# EAGLE board bt121_breakout_board_v10 (EAGLE 6.5.0)
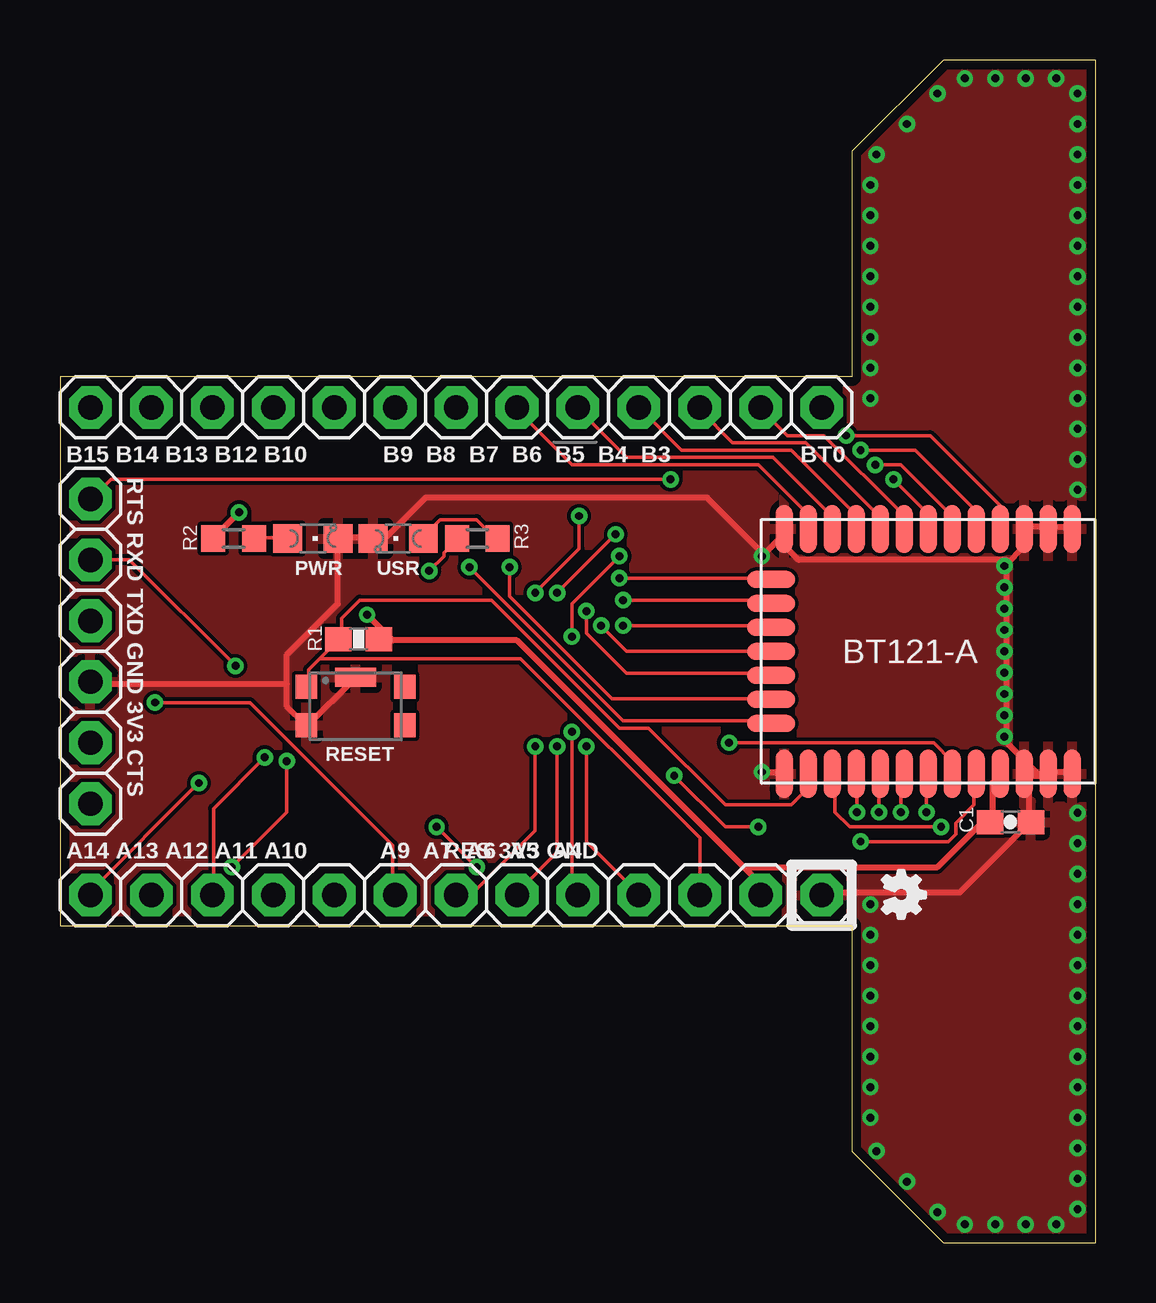
[diagram p0: board, top side]
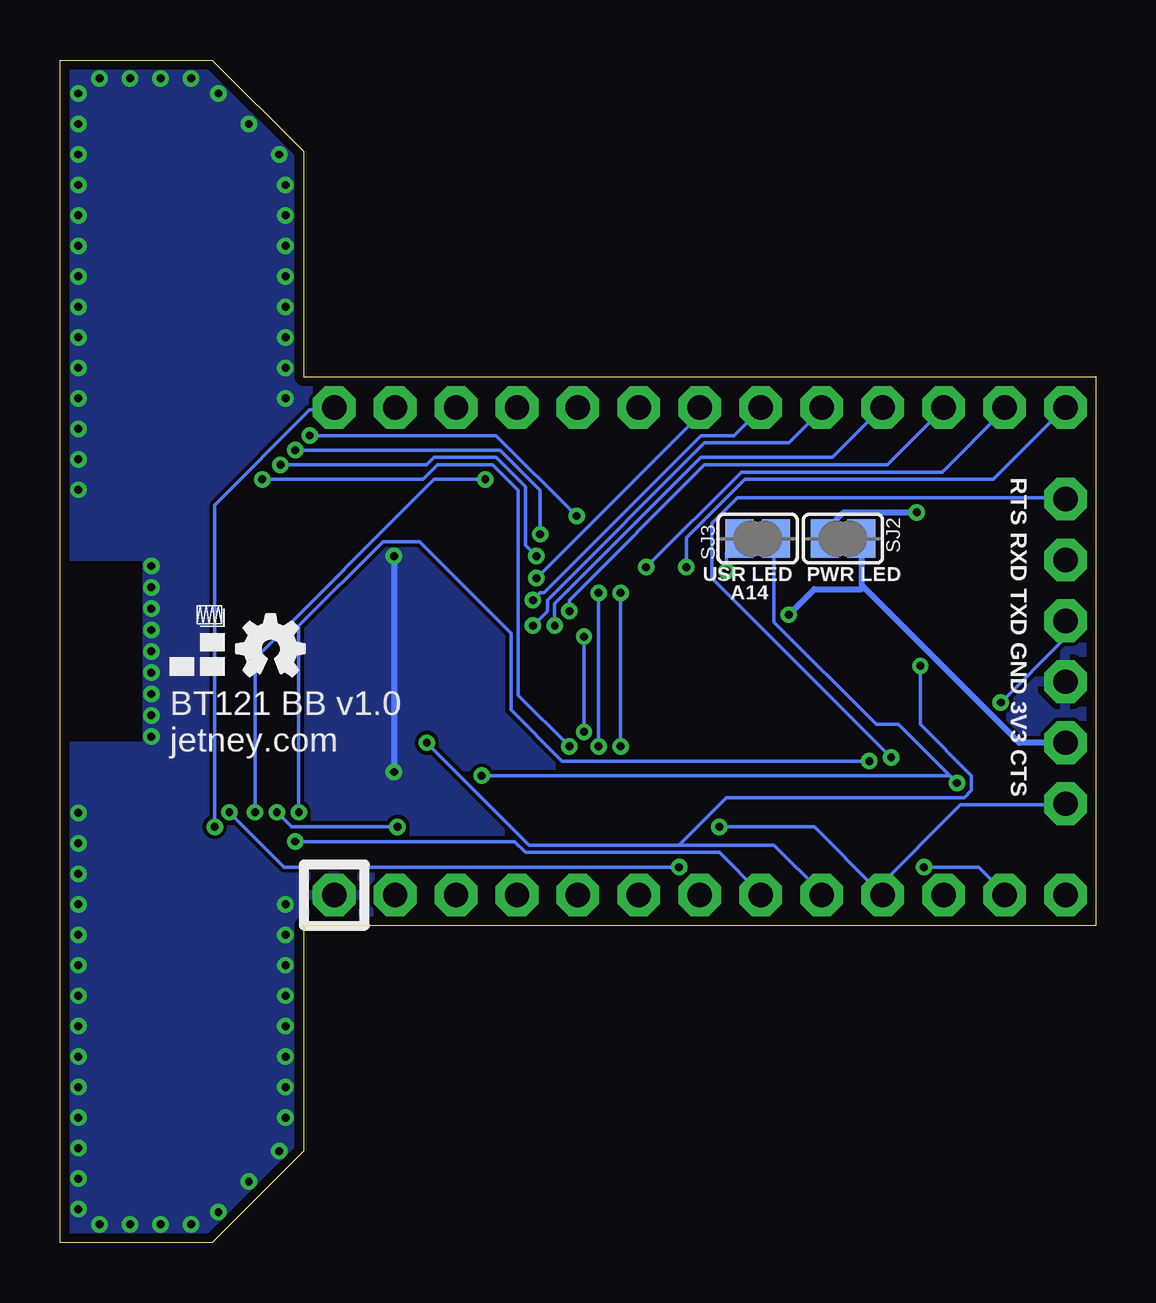
[diagram p1: board, bottom side, seen from below]

Size 43.18 x 49.28 mm. Coordinates in mm from the lower left corner, seen from the top.
Outline: 0,13.21 33.02,13.21 33.02,3.81 36.83,0 43.18,0 43.18,49.28 36.83,49.28 33.02,45.47 33.02,36.07 0,36.07 0,13.21
Copper layers (1*16): Top 0.0356mm / dielectric 1.5011mm / Bottom 0.0356mm
Design rules "default": minimum track width 6mil, minimum drill 13mil, track to track 6mil, track to pad 6mil, pad to pad 6mil, via to via 6mil, smd to smd 6mil, copper to edge 15mil, drill to drill 6mil, minimum pad ring 7mil, minimum via ring 7mil, stop-mask expansion 4mil, vias tented up to drill 13mil, thermal gap 10mil
Net classes: 0 default: width 0.152 mm, drill 0.33 mm, clearance 0.152 mm; 1 power: width 0.254 mm, drill 0.33 mm, clearance 0.152 mm
vRestrict: area 0,32.5 to 33,33.3; area 0,16 to 33,16.9; area 30.5,19.6 to 40.6,29.7; area 2.8,17 to 3.6,32.3

## Footprints (pad centres in the part's own frame; a part is rotated, then mirrored left to right if it is on the bottom)
0603-CAP = smd 1.1 x 1: 1 -0.85,0; 2 0.85,0
1X13 = drill 1.016 pad 1.778 octagon: 1 -15.24,0; 2 -12.7,0; 3 -10.16,0; 4 -7.62,0; 5 -5.08,0; 6 -2.54,0; 7 0,0; 8 2.54,0; 9 5.08,0; 10 7.62,0; 11 10.16,0; 12 12.7,0; 13 15.24,0
1X06 = drill 1.016 pad 1.778 octagon: 1 -6.35,0; 2 -3.81,0; 3 -1.27,0; 4 1.27,0; 5 3.81,0; 6 6.35,0
CHIPLED_0805 = smd 1.2 x 1.2: A 0,-1.05; C 0,1.05
0603-RES = smd 1.1 x 1: 1 -0.85,0; 2 0.85,0
R0603 = smd 1 x 1.1: 1 -0.85,0; 2 0.85,0
101-IG = smd 0.9 x 1: 1 -2.05,0.8; 2 -2.05,-0.8; 3 2.05,0.8; 4 2.05,-0.8 | smd 1.7 x 0.8: GND 0,1.2
SJ = smd 1.168 x 1.6: 1 -0.762,0; 2 0.762,0
BT121-A = smd 2 x 0.7: BOOT0 5.1,-4; GND -5.1,6; GND@2 -5.1,4; GND@3 -5.1,-6; GND@4 5.1,-6; GND@5 5.1,4; GND@6 5.1,5; GND@7 5.1,6; PA4 -5.1,0; PA5 -5.1,1; PA6 -5.1,2; PA7 -5.1,3; PA9 5.1,2; PA10 5.1,1; PA11 5.1,0; PA12 5.1,-1; PA13 5.1,-3; PA14 5.1,-2; PB3 -5.1,-1; PB4 -5.1,-2; PB5 -5.1,-3; PB6 -5.1,-4; PB7 -5.1,-5; RESET 5.1,-5; RF -5.1,5; VDD 5.1,3 | smd 0.7 x 2: PB8 -3,-6.55; PB9 -2,-6.55; PB10 -1,-6.55; PB12 0,-6.55; PB13 1,-6.55; PB14 2,-6.55; PB15 3,-6.55

## Placement (x,y rotation side)
C1  1uF  [0603-CAP]  39.62,17.53 0 top
JP1  [1X13]  16.51,34.8 180 top
JP2  [1X13]  16.51,14.48 180 top
JP3  [1X06]  1.27,24.64 270 top
LOGO1  OSHW_LOGO_FILLX0100-NT  [OSHW_FILLX100_NOTEXT]  35.81,23.62 0 bottom
LOGO2  OSHW_LOGO_FILLX0070-NT  [OSHW_FILLX70_NOTEXT]  34.29,15.49 270 top
PWR  GREEN  [CHIPLED_0805]  10.54,29.34 270 top
R1  10K  [0603-RES]  12.45,25.15 0 top
R2  470  [R0603]  7.24,29.34 0 top
R3  470  [R0603]  17.4,29.34 0 top
S1  RESET  [101-IG]  12.32,22.35 0 top
SJ2  PWR LED  [SJ]  10.54,29.34 180 bottom
SJ3  USR LED  [SJ]  14.1,29.34 180 bottom
U1  BT121-A  [BT121-A]  36.2,24.64 270 top
U$2  JETNEY-LOGO-12  [JETNEY-LOGO-12]  38.61,23.62 0 bottom
USR  BLUE  [CHIPLED_0805]  14.1,29.34 90 top

## Library data of the parts
C1 R1 = SparkFun
JP1-JP3 = sf-pinhead
LOGO1 LOGO2 = oshw-logo
PWR USR = led
R2 R3 = resistor
S1 U$2 = sf-keyglove
SJ2 SJ3 = jumper
U1 = sf-bluegiga; ANTENNA: On-module ceramic chip antenna

## Nets
3.3V [power]: C1.1 JP2.2 JP3.5 R1.2 SJ2.1 U1.VDD
BOOT0: JP1.1 U1.BOOT0
GND [power]: C1.2 JP2.1 JP3.4 PWR.C S1.2 S1.GND U1.GND U1.GND@2 U1.GND@3 U1.GND@4 U1.GND@5 U1.GND@6 U1.GND@7 U1.RF USR.C
N$1: PWR.A R2.2
N$3 [power]: R2.1 SJ2.2
N$4: R3.2 USR.A
N$5: R3.1 SJ3.2
PA4: JP2.4 U1.PA4
PA5: JP2.5 U1.PA5
PA6: JP2.6 U1.PA6
PA7: JP2.7 U1.PA7
PA9: JP2.8 JP3.3 U1.PA9
PA10: JP2.9 JP3.2 U1.PA10
PA11: JP2.10 JP3.6 U1.PA11
PA12: JP2.11 JP3.1 U1.PA12
PA13: JP2.12 U1.PA13
PA14: JP2.13 SJ3.1 U1.PA14
PB3: JP1.2 U1.PB3
PB4: JP1.3 U1.PB4
PB5: JP1.4 U1.PB5
PB6: JP1.5 U1.PB6
PB7: JP1.6 U1.PB7
PB8: JP1.7 U1.PB8
PB9: JP1.8 U1.PB9
PB10: JP1.9 U1.PB10
PB12: JP1.10 U1.PB12
PB13: JP1.11 U1.PB13
PB14: JP1.12 U1.PB14
PB15: JP1.13 U1.PB15
RESET: JP2.3 R1.1 S1.1 U1.RESET

## Tracks (layer width: path | path; a pad name or v marks a point on that pad's centre or on a via)
3.3V  (via drill 0.33)
  Top 0.254: U1.VDD 39.17,19.46 38.86,19.15 38.86,17.63 C1.1 38.71,17.48 38.41,17.48 36.58,15.65 28.65,15.65 28.57,15.57 | 13.87,25.09 19.05,25.09 28.57,15.57 | 13.87,25.09 13.41,25.09 R1.2 | 28.57,15.57 29.11,15.04 29.11,14.58 JP2.2 | 13.87,25.09 v12.8,26.16
  Bottom 0.254: 9.68,27.3 3.2,20.83 JP3.5 | 9.68,27.3 9.75,27.38 9.75,29.21 SJ2.1 | v12.8,26.16 11.73,27.23 9.75,27.23 9.68,27.3
BOOT0  (via drill 0.33)
  Top 0.152: v36.73,17.32 32.92,17.32 32.31,17.93 32.31,19.46 U1.BOOT0
  Bottom 0.152: v36.73,17.32 36.73,30.73 32.77,34.7 31.85,34.7 JP1.1
GND  (via drill 0.33)
  Top 0.254: S1.GND 12.19,23.42 10.36,21.59 S1.2 10.21,21.59 9.45,22.35 9.45,23.27 | 9.45,23.27 9.45,24.49 11.58,26.62 11.58,29.21 PWR.C 11.73,29.36 12.95,29.36 USR.C 13.11,29.36 13.56,29.36 15.24,31.04 26.98,31.04 29.26,28.75 v29.26,28.6 30.33,29.67 U1.GND@3 | 9.45,23.27 1.37,23.27 JP3.4 | v29.26,19.61 30.18,19.61 U1.GND@4 | 30.18,29.82 U1.GND@3 | 42.22,29.82 U1.GND 42.06,29.82 41.3,29.82 U1.RF 41.15,29.82 40.23,29.82 U1.GND@2 40.08,29.67 40.08,28.91 39.55,28.37 | 42.22,19.61 U1.GND@7 42.06,19.61 41.3,19.61 U1.GND@6 41.15,19.46 40.84,19.46 | U1.GND@5 40.23,19.46 40.39,19.3 40.39,17.63 C1.2 40.39,17.48 37.49,14.58 31.85,14.58 JP2.1 | 40.23,19.61 U1.GND@5 | 40.84,19.46 40.39,19.46 U1.GND@5 | 39.55,28.37 39.47,28.3 39.47,20.83 40.84,19.46 | U1.GND@3 30.02,29.21 30.79,28.45 39.47,28.45 39.55,28.37
  Bottom 0.254: v29.26,28.6 v29.26,19.61
  other vias: 39.37,28.19 39.37,27.3 39.37,26.42 39.37,25.53 39.37,24.64 39.37,23.75 39.37,22.86 39.37,21.97 39.37,21.08 42.42,31.37 42.42,32.64 42.42,33.91 42.42,35.18 42.42,36.45 42.42,37.72 42.42,38.99 42.42,40.26 42.42,41.53 42.42,42.8 42.42,44.07 42.42,45.34 42.42,46.61 42.42,47.88 41.53,48.51 40.26,48.51 38.99,48.51 37.72,48.51 36.58,47.88 35.31,46.61 34.04,45.34 33.78,44.07 33.78,42.8 33.78,41.53 33.78,40.26 33.78,38.99 33.78,37.72 33.78,36.45 33.78,35.18 42.42,17.91 42.42,16.64 42.42,15.37 42.42,14.1 42.42,12.83 42.42,11.56 42.42,10.29 42.42,9.02 42.42,7.75 42.42,6.48 42.42,5.21 42.42,3.94 42.42,2.67 42.42,1.4 41.53,0.76 40.26,0.76 38.99,0.76 37.72,0.76 36.58,1.27 35.31,2.54 34.04,3.81 33.78,5.21 33.78,6.48 33.78,7.75 33.78,9.02 33.78,10.29 33.78,11.56 33.78,12.83 33.78,14.1
  pour Bottom: 0,36.07 33.02,36.07 33.02,50.04 43.18,50.04 43.18,-0.76 33.02,-0.76 33.02,13.21 0,13.21
  pour Top: 0,36.07 33.02,36.07 33.02,50.04 43.18,50.04 43.18,-0.76 33.02,-0.76 33.02,13.21 0,13.21
N$1
  Top 0.152: R2.2 8.23,29.36 9.45,29.36 PWR.A
N$3  (via drill 0.33)
  Top 0.254: v7.47,30.43 6.4,29.36 R2.1
  Bottom 0.254: v7.47,30.43 10.52,30.43 11.28,29.67 11.28,29.36 SJ2.2
N$4
  Top 0.152: R3.2 18.14,29.36 17.37,30.12 15.85,30.12 15.09,29.36 USR.A
N$5  (via drill 0.33)
  Top 0.152: v15.39,27.99 16,28.6 16,28.75 16.46,29.21 R3.1
  Bottom 0.152: v15.39,27.99 15.39,28.75 14.94,29.21 SJ3.2
N$6
  Bottom 0.152: 10.03,29.34 11.05,29.34
N$8
  Bottom 0.152: 13.59,29.34 14.61,29.34
PA4  (via drill 0.33)
  Top 0.152: v34.75,31.8 36.12,30.43 36.12,29.82 U1.PA4 | v21.95,20.68 21.95,16.71 24.08,14.58 JP2.4
  Bottom 0.152: v34.75,31.8 28.04,31.8 27.43,32.41 25.15,32.41 24.08,31.34 24.08,22.81 v21.95,20.68
PA5  (via drill 0.33)
  Top 0.152: v33.98,32.41 35.05,32.41 37.19,30.28 37.19,29.82 U1.PA5 | v23.32,28.6 21.34,26.62 v21.34,25.25 | v21.34,21.29 21.34,14.73 JP2.5
  Bottom 0.152: v33.98,32.41 27.89,32.41 27.58,32.72 24.99,32.72 23.77,31.5 23.77,29.06 v23.32,28.6 | v21.34,21.29 v21.34,25.25
PA6  (via drill 0.33)
  Top 0.152: v33.38,33.02 35.66,33.02 38.1,30.58 38.1,29.82 U1.PA6 | v20.73,27.08 v23.16,29.52 | v20.73,20.68 20.73,16.26 19.05,14.58 JP2.6
  Bottom 0.152: v33.38,33.02 24.84,33.02 23.16,31.34 v23.16,29.52 | v20.73,20.68 v20.73,27.08
PA7  (via drill 0.33)
  Top 0.152: v32.77,33.63 36.27,33.63 39.17,30.73 39.17,29.82 U1.PA7 | v21.64,30.28 21.64,28.91 v19.81,27.08 | v19.81,20.68 19.81,17.17 17.22,14.58 16.61,14.58 JP2.7
  Bottom 0.152: v32.77,33.63 24.99,33.63 v21.64,30.28 | v19.81,20.68 v19.81,27.08
PA9  (via drill 0.33)
  Top 0.152: v33.38,16.71 37.03,16.71 37.34,17.02 37.34,17.48 38.1,18.24 38.1,19.46 U1.PA9 | v3.96,22.5 7.92,22.5 13.87,16.56 13.87,14.58 JP2.8
  Bottom 0.152: v33.38,16.71 24.23,16.71 23.77,16.26 15.7,16.26 14.02,14.58 JP2.8 | v3.96,22.5 1.37,25.09 1.37,25.86 JP3.3
PA10  (via drill 0.33)
  Top 0.152: v27.89,20.83 36.42,20.83 37.19,20.07 37.19,19.61 U1.PA10 | JP3.2 2.9,28.45 v7.32,24.03
  Bottom 0.152: v27.89,20.83 23.62,16.56 17.37,16.56 | 17.37,16.56 13.41,16.56 11.43,14.58 JP2.9 | v7.32,24.03 7.32,21.59 5.18,19.46 5.18,18.85 5.49,18.54 15.39,18.54 17.37,16.56
PA11  (via drill 0.33)
  Top 0.152: v36.12,17.93 36.12,19.46 U1.PA11 | v15.7,17.32 v17.37,15.65
  Bottom 0.152: v36.12,17.93 33.83,15.65 v17.37,15.65 | v15.7,17.32 11.73,17.32 9.14,14.73 | 9.14,14.73 JP2.10 8.99,14.58 | 9.14,14.73 5.64,18.24 1.37,18.24 JP3.6
PA12  (via drill 0.33)
  Top 0.152: v35.05,17.93 35.05,19.46 U1.PA12 | v25.45,31.8 2.13,31.8 1.37,31.04 JP3.1 | v8.53,20.22 6.4,18.09 6.4,14.58 JP2.11
  Bottom 0.152: v35.05,17.93 35.05,24.33 27.58,31.8 v25.45,31.8 | v8.53,20.22 16,27.69 16,29.97 14.94,31.04 1.37,31.04 JP3.1
PA13  (via drill 0.33)
  Top 0.152: v33.22,17.93 33.22,19.46 U1.PA13 | v9.45,20.07 9.45,17.93 v7.16,15.65
  Bottom 0.152: v33.22,17.93 33.22,25.7 29.72,29.21 28.19,29.21 24.38,25.4 24.38,22.2 22.25,20.07 v9.45,20.07 | v7.16,15.65 4.88,15.65 3.81,14.58 JP2.12
PA14  (via drill 0.33)
  Top 0.152: v5.79,19.15 1.22,14.58 JP2.13 | v34.14,17.93 34.14,19.46 U1.PA14 | v29.11,17.32 27.74,17.32 v25.6,19.46
  Bottom 0.152: v5.79,19.15 6.1,19.46 | 6.1,19.46 8.23,21.59 9.14,21.59 13.41,25.86 13.41,29.21 SJ3.1 | v34.14,17.93 33.53,17.32 v29.11,17.32 | 6.1,19.46 v25.6,19.46
PB3
  Top 0.152: U1.PB3 35.05,29.82 35.05,30.43 31.85,33.63 30.33,33.63 29.26,34.7 JP1.2
PB4
  Top 0.152: U1.PB4 34.14,29.82 34.14,30.28 31.09,33.33 28.04,33.33 26.67,34.7 JP1.3
PB5
  Top 0.152: JP1.4 25.91,33.02 30.48,33.02 33.07,30.43 33.07,29.82 U1.PB5
PB6
  Top 0.152: U1.PB6 32.16,29.82 32.16,30.28 29.72,32.72 23.62,32.72 21.64,34.7 JP1.5
PB7
  Top 0.152: U1.PB7 31.09,29.82 31.09,30.43 29.11,32.41 21.34,32.41 19.05,34.7 JP1.6
PB8  (via drill 0.33)
  Top 0.152: v23.32,27.69 29.57,27.69 U1.PB8
  Bottom 0.152: v23.32,27.69 16.61,34.39 16.61,34.7 JP1.7
PB9  (via drill 0.33)
  Top 0.152: v23.47,26.77 29.57,26.77 U1.PB9
  Bottom 0.152: v23.47,26.77 23.16,27.08 23.01,27.08 16.46,33.63 15.09,33.63 14.02,34.7 JP1.8
PB10  (via drill 0.33)
  Top 0.152: v23.47,25.7 29.57,25.7 U1.PB10
  Bottom 0.152: v23.47,25.7 22.86,26.31 22.86,26.77 16.31,33.33 12.8,33.33 11.43,34.7 JP1.9
PB12  (via drill 0.33)
  Top 0.152: U1.PB12 23.62,24.64 v22.55,25.7
  Bottom 0.152: v22.55,25.7 22.55,26.62 16.46,32.72 10.97,32.72 JP1.10
PB13  (via drill 0.33)
  Top 0.152: v21.95,26.31 21.95,25.4 23.62,23.72 29.57,23.72 U1.PB13
  Bottom 0.152: v21.95,26.31 21.95,26.77 16.31,32.41 8.69,32.41 6.4,34.7 JP1.11
PB14  (via drill 0.33)
  Top 0.152: v18.75,28.14 18.75,26.92 23.01,22.66 29.57,22.66 U1.PB14
  Bottom 0.152: v18.75,28.14 14.78,32.11 6.4,32.11 3.81,34.7 JP1.12
PB15  (via drill 0.33)
  Top 0.152: v17.07,28.14 23.47,21.74 29.57,21.74 U1.PB15
  Bottom 0.152: v17.07,28.14 17.07,29.36 14.63,31.8 4.27,31.8 JP1.13
RESET
  Top 0.152: 10.82,24.33 11.58,25.09 R1.1 11.73,25.25 11.73,26.01 12.5,26.77 17.98,26.77 23.32,21.44 24.54,21.44 27.74,18.24 30.48,18.24 31.09,18.85 31.09,19.46 U1.RESET | 10.82,24.33 10.36,23.88 10.36,23.27 S1.1 | JP2.3 26.67,16.87 19.2,24.33 10.82,24.33

## Text on the board
tPlace: B15 B14 B13 B12 B10 | RTS RXD TXD GND 3V3 CTS | B9 B8 B7 B6 B5 B4 B3 | BT0 | BT121-A | RESET | A14 A13 A12 A11 A10 RES 3V3 GND | A9 A7 A6 A5 A4
bPlace: RTS RXD TXD GND 3V3 CTS | PWR LED | A14 | USR LED | BT121 BB v1.0 | jetney.com